# EAGLE board test_3 (EAGLE 7.0.0)

Size 179 x 187 mm. Coordinates in mm from the lower left corner, seen from the top.
Outline: 0,0 0,187 179,187 179,0 0,0
Copper layers (1*16): Top 0.035mm / dielectric 1.5mm / Bottom 0.035mm
Design rules "default": minimum track width 10mil, minimum drill 0.6mm, track to track 8mil, track to pad 8mil, pad to pad 8mil, via to via 8mil, smd to smd 8mil, copper to edge 40mil, drill to drill 8mil, minimum pad ring 10mil, minimum via ring 8mil, stop-mask expansion 4mil, vias tented up to drill 0mil, thermal gap 10mil

## Footprints (pad centres in the part's own frame; a part is rotated, then mirrored left to right if it is on the bottom)
BATTERY_9V_KEYSTONE_968 = drill 2.2: N 6.35,0 | drill 2.2 octagon: P -6.35,0
CAPPRD750W80D1600H2200P = drill 1 pad 1.5 square: 1 -3.75,0 | drill 1 pad 1.5: 2 3.75,0
CAPPRD250W80D630H1220P = drill 1 pad 1.5 square: 1 -1.25,0 | drill 1 pad 1.5: 2 1.25,0
CAPPRD500W80D1000H2200P = drill 1 pad 1.5 square: 1 -2.5,0 | drill 1 pad 1.5: 2 2.5,0
DIOAD1125W78L520D270_HS = drill 1.06 pad 1.59: A 5.625,0 | drill 1.06 pad 1.59 square: C -5.625,0
ANALOG_DISTANCE_SENSOR_GLUE_MOUNT = drill 0.9 long: GND 0.18,-9.977; VCC 2.72,-9.977; VO -2.36,-9.977
SPARKFUN_DUAL_MOTOR_DRIVER = drill 1.016 pad 1.88 long: A01 7.62,1.27; A02 7.62,-1.27; AIN1 -7.62,3.81; AIN2 -7.62,6.35; B01 7.62,-6.35; B02 7.62,-3.81; BIN1 -7.62,-1.27; BIN2 -7.62,-3.81; GND -7.62,-8.89; GND1 7.62,3.81; GND2 7.62,-8.89; PWMA -7.62,8.89; PWMB -7.62,-6.35; STBY -7.62,1.27; VCC 7.62,6.35; VM 7.62,8.89
SOLARBOTICS_G2_LEFT = drill 1.27 long: + -40.545,-3.68; - -43.45,-3.68 | hole 3: -25.1,-10.2; -25.1,3.6
LED5MM = drill 0.9 pad 1.676 square: A -1.27,0 | drill 0.9 pad 1.676: K 1.27,0
RESAD770W45L370D210_HS = drill 0.7 pad 1.1: 1 -3.85,0; 2 3.85,0
SOLARBOTICS_G2 = drill 1.27 long: + 40.545,-3.68; - 42.815,-3.68 | hole 3: 25.1,-10.2; 25.1,3.6
ADAFRUIT-PRO-TRINKET-5V-NOFTDI = drill 1.016 pad 1.778: +5V 7.62,24.13; A0 -7.62,16.51; A1 -7.62,13.97; A2 -7.62,11.43; A3 -7.62,8.89; A4 -7.62,6.35; A5 -7.62,3.81; AREF -7.62,19.05; D3 7.62,11.43; D4 7.62,13.97; D5 7.62,16.51; D6 7.62,19.05; D8 7.62,21.59; D9 -7.62,31.75; D10 -7.62,29.21; D11 -7.62,26.67; D12 -7.62,24.13; D13 -7.62,21.59; GND2 7.62,29.21; RESET 7.62,3.81; RXD1 7.62,6.35; TXD1 7.62,8.89; VBAT 7.62,31.75; VBUS1 7.62,26.67 | drill 1 pad 1.778: A6 -5.08,16.51; A7 -5.08,13.97
ADAFRUIT-3/4IN-CASTER = hole 2: -7.62,0; 7.62,0
BUZZER-12MM-ADAFRUIT-160 = drill 1 pad 1.778 square: + 2.5,0 | drill 1 pad 1.778: - -3,0
SERVO_MICRO_SIDE_GLUE = drill 0.9: A1 8.97,-5.2; GND1 3.89,-5.2; PWR1 6.43,-5.2

## Placement (x,y rotation side)
BATT1_1_battery  BATTERY-9V-VERTICAL  [BATTERY_9V_KEYSTONE_968]  129.5,71.5 270 top
C1_2_drive  3300uF  [CAPPRD750W80D1600H2200P]  127.58,38.5 0 top
C1_4_distanceSensor  100uF  [CAPPRD250W80D630H1220P]  116.07,177.45 0 top
C1_6_Servo  1000uF  [CAPPRD500W80D1000H2200P]  158.97,59.45 0 top
C1_7_distanceSensor_2  100uF  [CAPPRD250W80D630H1220P]  112.07,17.45 0 top
D1_1_battery  [DIOAD1125W78L520D270_HS]  89.5,93.5 0 top
D1_4_distanceSensor  ANALOG_DISTANCE_SENSOR-GLUE  [ANALOG_DISTANCE_SENSOR_GLUE_MOUNT]  90.19,179.66 0 top
D1_7_distanceSensor_2  ANALOG_DISTANCE_SENSOR-GLUE  [ANALOG_DISTANCE_SENSOR_GLUE_MOUNT]  88.81,7.34 180 top
DRVR_2_drive  SPARKFUN_DUAL_MOTOR_DRIVER-BOB  [SPARKFUN_DUAL_MOTOR_DRIVER]  57.5,151.21 0 top
L_2_drive  SOLARBOTICS_GM2_LEFT  [SOLARBOTICS_G2_LEFT]  189.21,148 0 top
LED1_8_led  [LED5MM]  83.08,129.5 0 top
LED1_9_led_3  [LED5MM]  107.08,117.5 0 top
LED1_10_led_2  [LED5MM]  80.08,105.5 0 top
LED1_11_led_4  [LED5MM]  91.08,117.5 0 top
logo  [BUILT_WITH_GADGETRON]  89.5,93.5 0 bottom
R1_8_led  330  [RESAD770W45L370D210_HS]  89.5,93.5 0 top
R1_9_led_3  330  [RESAD770W45L370D210_HS]  89.5,93.5 0 top
R1_10_led_2  330  [RESAD770W45L370D210_HS]  89.5,93.5 0 top
R1_11_led_4  330  [RESAD770W45L370D210_HS]  89.5,93.5 0 top
R_2_drive  SOLARBOTICS_GM2  [SOLARBOTICS_G2]  -12.33,148 0 top
U1_0_brain  ADAFRUIT-PRO-TRINKET-5V-NOFTDI  [ADAFRUIT-PRO-TRINKET-5V-NOFTDI]  76.84,145.47 270 top
u1_3_caster  CASTERADAFRUIT-3/4IN  [ADAFRUIT-3/4IN-CASTER]  92.5,44.5 0 top
u1_5_buzzer  BUZZER-ADAFRUIT-160  [BUZZER-12MM-ADAFRUIT-160]  159.48,91.25 0 top
U1_6_Servo  SERVO-MICRO_SIDE_GLUE  [SERVO_MICRO_SIDE_GLUE]  162.7,45.71 270 top

## Library data of the parts
BATT1_1_battery = Components; DIST: Digikey; DISTPN: 36-968-ND; HIERARCHY_NAME: battery.BATT1
C1_2_drive = KoalaBuild; DATASHEET: http://industrial.panasonic.com/www-cgi/jvcr13pz.cgi?E+PZ+3+ABA0012+ECA1EM332+7+WW; DATA_SHEET: http://industrial.panasonic.com/www-cgi/jvcr13pz.cgi?E+PZ+3+ABA0012+ECA1EM332+7+WW; DB: /Users/swanson/research/NVSL/src/with-git/gtron_devel/Gadgets/Tools/Koala/Koala/PartLibrary/Digikey/Capacitors-AluminumTH.csv; DEVICE: TH-RADIAL_ALUMINUM_16MM; DIST: Digikey; DISTPN: P5158-ND; HIERARCHY_NAME: drive.C1; IMAGE: http://media.digikey.com/Photos/Panasonic%20Photos/ECA-1CM472.jpg; MFR: Panasonic Electronic Components; MIN_QTY: 1; MPN: ECA-1EM332; PACKAGE: CAPPRD750W80D1600H2200P; PRICE: $1.13; SIZE: TH; STOCK: STOCK; TOL: 20%; VALUE_QUERY: >3000uF; VOLTS: ( >= 5)V
C1_4_distanceSensor = KoalaBuild; DATASHEET: http://industrial.panasonic.com/www-cgi/jvcr13pz.cgi?E+PZ+3+ABA0012+ECA1EM101+7+WW; DATA_SHEET: http://industrial.panasonic.com/www-cgi/jvcr13pz.cgi?E+PZ+3+ABA0012+ECA1EM101+7+WW; DB: /Users/swanson/research/NVSL/src/with-git/gtron_devel/Gadgets/Tools/Koala/Koala/PartLibrary/Digikey/Capacitors-AluminumTH.csv; DEVICE: TH-RADIAL_ALUMINUM_6.3MM; DIST: Digikey; DISTPN: P5152-ND; HIERARCHY_NAME: distanceSensor.C1; IMAGE: http://media.digikey.com/Photos/Panasonic%20Photos/ECA-1EM101B.JPG; MFR: Panasonic Electronic Components; MIN_QTY: 1; MPN: ECA-1EM101; PACKAGE: CAPPRD250W80D630H1220P; PRICE: $0.25; SIZE: TH; STOCK: STOCK; TOL: 20%; VALUE_QUERY: >10uF; VOLTS: ( >= 5)V
C1_6_Servo = KoalaBuild; DATASHEET: http://industrial.panasonic.com/www-cgi/jvcr13pz.cgi?E+PZ+3+ABA0012+ECA1EM102+7+WW; DATA_SHEET: http://industrial.panasonic.com/www-cgi/jvcr13pz.cgi?E+PZ+3+ABA0012+ECA1EM102+7+WW; DB: /Users/swanson/research/NVSL/src/with-git/gtron_devel/Gadgets/Tools/Koala/Koala/PartLibrary/Digikey/Capacitors-AluminumTH.csv; DEVICE: TH-RADIAL_ALUMINUM_10MM; DIST: Digikey; DISTPN: P5156-ND; HIERARCHY_NAME: Servo.C1; IMAGE: http://media.digikey.com/Photos/Panasonic%20Photos/ECA-1AM102B.JPG; MFR: Panasonic Electronic Components; MIN_QTY: 1; MPN: ECA-1EM102; PACKAGE: CAPPRD500W80D1000H2200P; PRICE: $0.68; SIZE: TH; STOCK: STOCK; TOL: 20%; VALUE_QUERY: > 1000uF; VOLTS: ( >= 5)V
C1_7_distanceSensor_2 = KoalaBuild; DATASHEET: http://industrial.panasonic.com/www-cgi/jvcr13pz.cgi?E+PZ+3+ABA0012+ECA1EM101+7+WW; DATA_SHEET: http://industrial.panasonic.com/www-cgi/jvcr13pz.cgi?E+PZ+3+ABA0012+ECA1EM101+7+WW; DB: /Users/swanson/research/NVSL/src/with-git/gtron_devel/Gadgets/Tools/Koala/Koala/PartLibrary/Digikey/Capacitors-AluminumTH.csv; DEVICE: TH-RADIAL_ALUMINUM_6.3MM; DIST: Digikey; DISTPN: P5152-ND; HIERARCHY_NAME: distanceSensor_2.C1; IMAGE: http://media.digikey.com/Photos/Panasonic%20Photos/ECA-1EM101B.JPG; MFR: Panasonic Electronic Components; MIN_QTY: 1; MPN: ECA-1EM101; PACKAGE: CAPPRD250W80D630H1220P; PRICE: $0.25; SIZE: TH; STOCK: STOCK; TOL: 20%; VALUE_QUERY: >10uF; VOLTS: ( >= 5)V
D1_1_battery = KoalaBuild; DATASHEET: http://www.st.com/web/en/resource/technical/document/datasheet/CD00001625.pdf; DATA_SHEET: http://www.st.com/web/en/resource/technical/document/datasheet/CD00001625.pdf; DB: /Users/swanson/research/NVSL/src/with-git/gtron_devel/Gadgets/Tools/Koala/Koala/PartLibrary/Digikey/Schottky-Diodes-TH.csv; DEVICE: TH-DO-41-AND-DO-204AL; DIST: Digikey; DISTPN: 497-4547-1-ND; HIERARCHY_NAME: battery.D1; IMAGE: http://media.digikey.com/photos/STMicro%20Photos/1N5819.JPG; IRECT: 1A; MFR: STMicroelectronics; MIN_QTY: 1; MPN: 1N5817; PACKAGE: DIOAD1125W78L520D270_HS; PRICE: $0.57; SIZE: TH; STOCK: STOCK; VALUE: 450mV; VREV: 20V
D1_4_distanceSensor = Components; DIST: Pololu; DISTPN: 2450; HIERARCHY_NAME: distanceSensor.D1
D1_7_distanceSensor_2 = Components; DIST: Pololu; DISTPN: 2450; HIERARCHY_NAME: distanceSensor_2.D1
DRVR_2_drive = BOBs; DIST: Sparkfun; DISTPN: 9457; HIERARCHY_NAME: drive.DRVR
L_2_drive = Components; DIST: Solarbotics; DISTPN: gm2-assembly; HIERARCHY_NAME: drive.L
LED1_8_led = Components; DIST: Adafruit; DISTPN: 297; HIERARCHY_NAME: led.LED1
LED1_9_led_3 = Components; DIST: Adafruit; DISTPN: 301; HIERARCHY_NAME: led_3.LED1
LED1_10_led_2 = Components; DIST: Adafruit; DISTPN: 300; HIERARCHY_NAME: led_2.LED1
LED1_11_led_4 = Components; DIST: Adafruit; DISTPN: 754; HIERARCHY_NAME: led_4.LED1
logo = Artwork
R1_8_led = KoalaBuild; CASE: TH; DATASHEET: http://www.yageo.com/NewPortal/yageodocoutput?fileName=/pdf/throughhole/Yageo_LR_CFR_2013.pdf; DATA_SHEET: http://www.yageo.com/NewPortal/yageodocoutput?fileName=/pdf/throughhole/Yageo_LR_CFR_2013.pdf; DB: /Users/swanson/research/NVSL/src/with-git/gtron_devel/Gadgets/Tools/Koala/Koala/PartLibrary/Digikey/Resistors-TH.csv; DEVICE: TH-1/6W-CARBON; DIST: Digikey; DISTPN: 330EBK-ND; HIERARCHY_NAME: led.R1; IMAGE: http://media.digikey.com/Renders/Yageo%20Renders/CFR-12JR-330R.jpg; MFR: Yageo; MIN_QTY: 1; MPN: CFR-12JB-52-330R; PACKAGE: RESAD770W45L370D210_HS; PRICE: $0.10; PWR: 167mW; SIZE: TH; STOCK: STOCK; TOL: 5%; VALUE_QUERY: 330
R1_9_led_3 = KoalaBuild; CASE: TH; DATASHEET: http://www.yageo.com/NewPortal/yageodocoutput?fileName=/pdf/throughhole/Yageo_LR_CFR_2013.pdf; DATA_SHEET: http://www.yageo.com/NewPortal/yageodocoutput?fileName=/pdf/throughhole/Yageo_LR_CFR_2013.pdf; DB: /Users/swanson/research/NVSL/src/with-git/gtron_devel/Gadgets/Tools/Koala/Koala/PartLibrary/Digikey/Resistors-TH.csv; DEVICE: TH-1/6W-CARBON; DIST: Digikey; DISTPN: 330EBK-ND; HIERARCHY_NAME: led_3.R1; IMAGE: http://media.digikey.com/Renders/Yageo%20Renders/CFR-12JR-330R.jpg; MFR: Yageo; MIN_QTY: 1; MPN: CFR-12JB-52-330R; PACKAGE: RESAD770W45L370D210_HS; PRICE: $0.10; PWR: 167mW; SIZE: TH; STOCK: STOCK; TOL: 5%; VALUE_QUERY: 330
R1_10_led_2 = KoalaBuild; CASE: TH; DATASHEET: http://www.yageo.com/NewPortal/yageodocoutput?fileName=/pdf/throughhole/Yageo_LR_CFR_2013.pdf; DATA_SHEET: http://www.yageo.com/NewPortal/yageodocoutput?fileName=/pdf/throughhole/Yageo_LR_CFR_2013.pdf; DB: /Users/swanson/research/NVSL/src/with-git/gtron_devel/Gadgets/Tools/Koala/Koala/PartLibrary/Digikey/Resistors-TH.csv; DEVICE: TH-1/6W-CARBON; DIST: Digikey; DISTPN: 330EBK-ND; HIERARCHY_NAME: led_2.R1; IMAGE: http://media.digikey.com/Renders/Yageo%20Renders/CFR-12JR-330R.jpg; MFR: Yageo; MIN_QTY: 1; MPN: CFR-12JB-52-330R; PACKAGE: RESAD770W45L370D210_HS; PRICE: $0.10; PWR: 167mW; SIZE: TH; STOCK: STOCK; TOL: 5%; VALUE_QUERY: 330
R1_11_led_4 = KoalaBuild; CASE: TH; DATASHEET: http://www.yageo.com/NewPortal/yageodocoutput?fileName=/pdf/throughhole/Yageo_LR_CFR_2013.pdf; DATA_SHEET: http://www.yageo.com/NewPortal/yageodocoutput?fileName=/pdf/throughhole/Yageo_LR_CFR_2013.pdf; DB: /Users/swanson/research/NVSL/src/with-git/gtron_devel/Gadgets/Tools/Koala/Koala/PartLibrary/Digikey/Resistors-TH.csv; DEVICE: TH-1/6W-CARBON; DIST: Digikey; DISTPN: 330EBK-ND; HIERARCHY_NAME: led_4.R1; IMAGE: http://media.digikey.com/Renders/Yageo%20Renders/CFR-12JR-330R.jpg; MFR: Yageo; MIN_QTY: 1; MPN: CFR-12JB-52-330R; PACKAGE: RESAD770W45L370D210_HS; PRICE: $0.10; PWR: 167mW; SIZE: TH; STOCK: STOCK; TOL: 5%; VALUE_QUERY: 330
R_2_drive = Components; DIST: Solarbotics; DISTPN: gm2-assembly; HIERARCHY_NAME: drive.R
U1_0_brain = BOBs; DIST: Adafruit; DISTPN: 2000; HIERARCHY_NAME: brain.U1
u1_3_caster = Components; DIST: Adafruit; DISTPN: 1200; HIERARCHY_NAME: caster.u1
u1_5_buzzer = Components; DIST: Adafruit; DISTPN: 160; HIERARCHY_NAME: buzzer.u1
U1_6_Servo = Components; DIST: Gadgetron; DISTPN: side-servo; HIERARCHY_NAME: Servo.U1

## Nets
+5V_0_brain: C1_4_distanceSensor.1 C1_7_distanceSensor_2.1 D1_4_distanceSensor.VCC D1_7_distanceSensor_2.VCC DRVR_2_drive.VCC U1_0_brain.+5V
A0_0_brain: D1_4_distanceSensor.VO U1_0_brain.A0
A1_0_brain: D1_7_distanceSensor_2.VO U1_0_brain.A1
A01_2_drive: DRVR_2_drive.A01 R_2_drive.+
A2_0_brain: LED1_9_led_3.A U1_0_brain.A2
A02_2_drive: DRVR_2_drive.A02 R_2_drive.-
A3_0_brain: LED1_10_led_2.A U1_0_brain.A3
A4_0_brain: LED1_11_led_4.A U1_0_brain.A4
A5_0_brain: U1_0_brain.A5
A6_0_brain: U1_0_brain.A6
A7_0_brain: U1_0_brain.A7
AREF_0_brain: U1_0_brain.AREF
B01_2_drive: DRVR_2_drive.B01 L_2_drive.+
B02_2_drive: DRVR_2_drive.B02 L_2_drive.-
D3_0_brain: U1_0_brain.D3 U1_6_Servo.A1
D4_0_brain: U1_0_brain.D4 u1_5_buzzer.+
D5_0_brain: DRVR_2_drive.PWMA U1_0_brain.D5
D6_0_brain: DRVR_2_drive.PWMB U1_0_brain.D6
D8_0_brain: DRVR_2_drive.STBY U1_0_brain.D8
D9_0_brain: DRVR_2_drive.AIN1 U1_0_brain.D9
D10_0_brain: DRVR_2_drive.AIN2 U1_0_brain.D10
D11_0_brain: DRVR_2_drive.BIN1 U1_0_brain.D11
D12_0_brain: DRVR_2_drive.BIN2 U1_0_brain.D12
D13_0_brain: LED1_8_led.A U1_0_brain.D13
GND_0_brain: BATT1_1_battery.N C1_2_drive.2 C1_4_distanceSensor.2 C1_6_Servo.2 C1_7_distanceSensor_2.2 D1_4_distanceSensor.GND D1_7_distanceSensor_2.GND DRVR_2_drive.GND DRVR_2_drive.GND1 DRVR_2_drive.GND2 R1_8_led.2 R1_9_led_3.2 R1_10_led_2.2 R1_11_led_4.2 U1_0_brain.GND2 u1_5_buzzer.- U1_6_Servo.GND1
N$1_1_battery: BATT1_1_battery.P D1_1_battery.A
N$1_8_led: LED1_8_led.K R1_8_led.1
N$1_9_led_3: LED1_9_led_3.K R1_9_led_3.1
N$1_10_led_2: LED1_10_led_2.K R1_10_led_2.1
N$1_11_led_4: LED1_11_led_4.K R1_11_led_4.1
POS_1_battery: C1_2_drive.1 C1_6_Servo.1 D1_1_battery.C DRVR_2_drive.VM U1_0_brain.VBAT U1_6_Servo.PWR1
RESET_0_brain: U1_0_brain.RESET
RXD1_0_brain: U1_0_brain.RXD1
TXD1_0_brain: U1_0_brain.TXD1
VBUS1_0_brain: U1_0_brain.VBUS1

## Text on the board
bPlace: Dynamic Wizard | Designed by allenlinxp